# EAGLE board GameboyCartridgeKS_Modest (EAGLE 6.3)
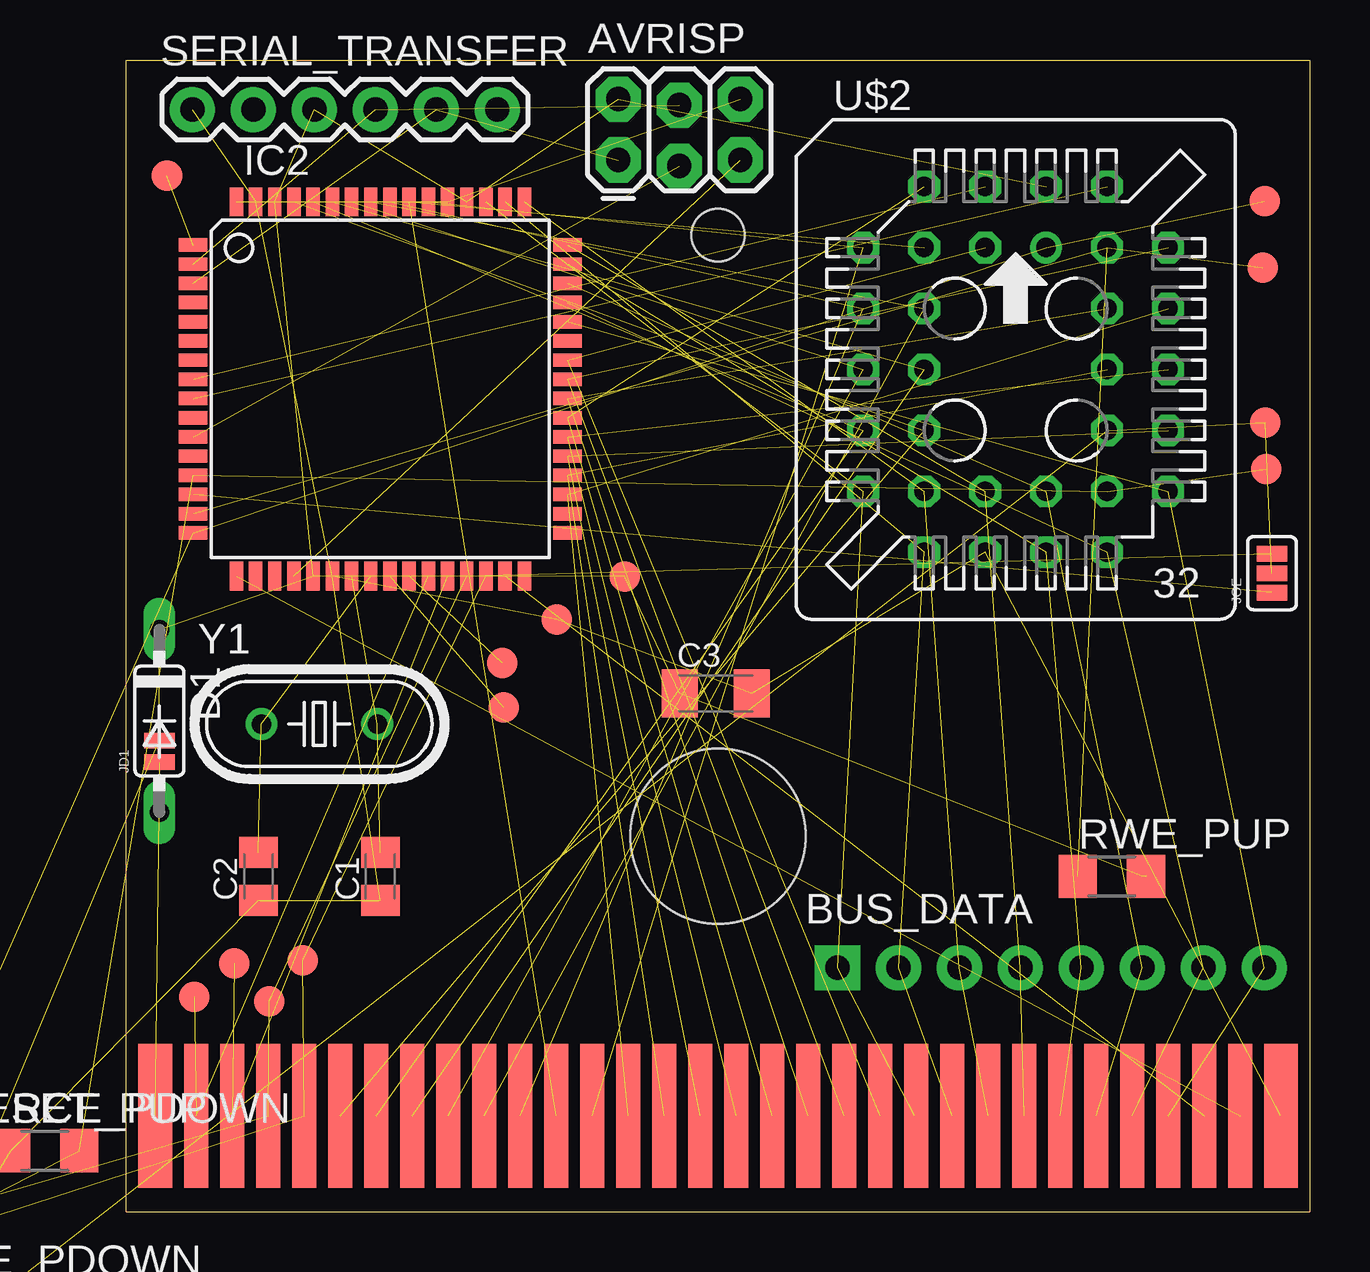
[diagram p0: board, top side]

Size 49.3 x 48 mm. Coordinates in mm from the lower left corner, seen from the top.
Outline: 49.3,48 49.3,0 0,0 0,48 49.3,48
Copper layers (1*16): Top 0.035mm / dielectric 1.5mm / Bottom 0.035mm
Design rules "default": minimum track width 6mil, minimum drill 12mil, track to track 6mil, track to pad 6mil, pad to pad 6mil, via to via 6mil, smd to smd 0mil, copper to edge 10mil, drill to drill 10mil, minimum pad ring 10mil, minimum via ring 6mil, stop-mask expansion 2mil, vias tented up to drill 100mil, thermal gap 10mil
Holes 7.3 mm at 24.65,15.65
Holes 2.2 mm at 24.65,40.7

## Footprints (pad centres in the part's own frame; a part is rotated, then mirrored left to right if it is on the bottom)
2X3_LOCK = drill 1.016 pad 1.88 octagon: 1 0,0; 2 0,2.54; 3 2.54,-0.254; 4 2.54,2.286; 5 5.08,0; 6 5.08,2.54
1X08_PIN1_NO_SILK = drill 1.016 pad 1.88 square: 1 0,0 | drill 1.016 pad 1.88: 2 2.54,0; 3 5.08,0; 4 7.62,0; 5 10.16,0; 6 12.7,0; 7 15.24,0; 8 17.78,0
C0805K = smd 1.3 x 1.6: 1 -1,0; 2 1,0
C1206K = smd 1.5 x 2: 1 -1.5,0; 2 1.5,0
DO35-7 = drill 0.813 long: A 3.81,0; C -3.81,0
TQFP64 = smd 1.194 x 0.559: 1 -7.8,6; 2 -7.8,5.2; 3 -7.8,4.4; 4 -7.8,3.6; 5 -7.8,2.8; 6 -7.8,2; 7 -7.8,1.2; 8 -7.8,0.4; 9 -7.8,-0.4; 10 -7.8,-1.2; 11 -7.8,-2; 12 -7.8,-2.8; 13 -7.8,-3.6; 14 -7.8,-4.4; 15 -7.8,-5.2; 16 -7.8,-6; 33 7.8,-6; 34 7.8,-5.2; 35 7.8,-4.4; 36 7.8,-3.6; 37 7.8,-2.8; 38 7.8,-2; 39 7.8,-1.2; 40 7.8,-0.4; 41 7.8,0.4; 42 7.8,1.2; 43 7.8,2; 44 7.8,2.8; 45 7.8,3.6; 46 7.8,4.4; 47 7.8,5.2; 48 7.8,6 | smd 0.559 x 1.194: 17 -6,-7.8; 18 -5.2,-7.8; 19 -4.4,-7.8; 20 -3.6,-7.8; 21 -2.8,-7.8; 22 -2,-7.8; 23 -1.2,-7.8; 24 -0.4,-7.8; 25 0.4,-7.8; 26 1.2,-7.8; 27 2,-7.8; 28 2.8,-7.8; 29 3.6,-7.8; 30 4.4,-7.8; 31 5.2,-7.8; 32 6,-7.8; 49 6,7.8; 50 5.2,7.8; 51 4.4,7.8; 52 3.6,7.8; 53 2.8,7.8; 54 2,7.8; 55 1.2,7.8; 56 0.4,7.8; 57 -0.4,7.8; 58 -1.2,7.8; 59 -2,7.8; 60 -2.8,7.8; 61 -3.6,7.8; 62 -4.4,7.8; 63 -5.2,7.8; 64 -6,7.8
PAD-JUMPER-2-NO_NO_SILK = smd 0.635 x 1.27: 1 -0.45,0; 2 0.45,0
PAD-JUMPER-3-NO_YES_SILK = smd 0.635 x 1.27: 1 -0.813,0; 2 0,0; 3 0.813,0
PAD.03X.05 = smd 1.27 x 1.27: P$1 0,0
R1206 = smd 1.6 x 1.803: 1 -1.422,0; 2 1.422,0
1X06 = drill 1.016 pad 1.88: 1 0,0; 2 2.54,0; 3 5.08,0; 4 7.62,0; 5 10.16,0; 6 12.7,0
CONNECTOR = smd 1.4 x 6: 1 0.7,-3; 32 47.6,-3 | smd 1 x 6: 2 2.4,-3; 3 3.9,-3; 4 5.4,-3; 5 6.9,-3; 6 8.4,-3; 7 9.9,-3; 8 11.4,-3; 9 12.9,-3; 10 14.4,-3; 11 15.9,-3; 12 17.4,-3; 13 18.9,-3; 14 20.4,-3; 15 21.9,-3; 16 23.4,-3; 17 24.9,-3; 18 26.4,-3; 19 27.9,-3; 20 29.4,-3; 21 30.9,-3; 22 32.4,-3; 23 33.9,-3; 24 35.4,-3; 25 36.9,-3; 26 38.4,-3; 27 39.9,-3; 28 41.4,-3; 29 42.9,-3; 30 44.4,-3; 31 45.9,-3
PLCC-S32 = drill 0.813: 1 1.27,5.08 | drill 0.813 octagon: 2 -1.27,7.62; 3 -1.27,5.08; 4 -3.81,7.62; 5 -6.35,5.08; 6 -3.81,5.08; 7 -6.35,2.54; 8 -3.81,2.54; 9 -6.35,0; 10 -3.81,0; 11 -6.35,-2.54; 12 -3.81,-2.54; 13 -6.35,-5.08; 14 -3.81,-7.62; 15 -3.81,-5.08; 16 -1.27,-7.62; 17 -1.27,-5.08; 18 1.27,-7.62; 19 1.27,-5.08; 20 3.81,-7.62; 21 6.35,-5.08; 22 3.81,-5.08; 23 6.35,-2.54; 24 3.81,-2.54; 25 6.35,0; 26 3.81,0; 27 6.35,2.54; 28 3.81,2.54; 29 6.35,5.08; 30 3.81,7.62; 31 3.81,5.08; 32 1.27,7.62
HC49U-V = drill 0.813: 1 -2.413,0; 2 2.413,0

## Placement (x,y rotation side)
AVRISP  AVR_SPI_PRG_62X3_LOCK  [2X3_LOCK]  20.49,43.83 0 top
BUS_DATA  [1X08_PIN1_NO_SILK]  29.63,10.16 0 top
C1  22pF  [C0805K]  10.58,13.97 90 top
C2  22pF  [C0805K]  5.5,13.97 90 top
C3  10uF  [C1206K]  24.55,21.59 0 top
D1  Germ.  [DO35-7]  1.37,20.45 270 top
IC2  MEGA64-A  [TQFP64]  10.58,34.29 0 top
JCE_CS  [PAD-JUMPER-2-NO_NO_SILK]  -12.28,-2.54 0 top  (outside the outline)
JD1  [PAD-JUMPER-2-NO_NO_SILK]  1.37,19.18 90 top
JOE  [PAD-JUMPER-3-NO_YES_SILK]  47.73,26.61 90 top
JOE_RD  [PAD-JUMPER-2-NO_NO_SILK]  -16.09,-2.54 0 top  (outside the outline)
PEN  TEST-POINT3X5  [PAD.03X.05]  1.69,43.18 0 top
RCE_PDOWN  [R1206]  -3.39,2.54 0 top
ROE_PDOWN  [R1206]  -7.2,-3.81 0 top  (outside the outline)
RRESET_PUP  [R1206]  -7.2,2.54 0 top  (outside the outline)
RWE_PUP  [R1206]  41.06,13.97 0 top
SCL  [PAD.03X.05]  15.72,21.02 0 top
SCL1  [PAD.03X.05]  2.83,8.95 0 top
SCL2  [PAD.03X.05]  4.48,10.35 0 top
SCL3  [PAD.03X.05]  5.94,8.76 0 top
SCL4  [PAD.03X.05]  7.34,10.48 0 top
SDA  [PAD.03X.05]  15.66,22.86 0 top
SERIAL_TRANSFER  [1X06]  2.75,45.93 0 top
TP1  [PAD.03X.05]  47.5,30.94 0 top
TP2  [PAD.03X.05]  47.45,32.89 0 top
TP3  [PAD.03X.05]  47.34,39.34 0 top
TP4  [PAD.03X.05]  47.42,42.11 0 top
TP5  [PAD.03X.05]  20.77,26.47 0 top
TP6  [PAD.03X.05]  17.93,24.67 0 top
U$1  CONNECTOR  [CONNECTOR]  0.5,7 0 top
U$2  EN29F002T  [PLCC-S32]  37.05,35.1 0 top
Y1  16MHz max  [HC49U-V]  8.04,20.32 0 top

## Library data of the parts
AVRISP BUS_DATA = SparkFun-Connectors
C1-C3 RCE_PDOWN ROE_PDOWN RRESET_PUP RWE_PUP = resistor
D1 = diode
IC2 = atmel; MPN: ATMEGA64-16AU; OC_FARNELL: 9171355; OC_NEWARK: 01M6899
JCE_CS JD1 JOE JOE_RD PEN SCL SCL1-SCL4 SDA TP1-TP6 = SparkFun-Passives
SERIAL_TRANSFER = SparkFun-Connectors; PROD_ID: CONN-08437
U$1 = gameboy
U$2 = kalshagar
Y1 = SparkFun-FreqCtrl

## Nets
22: BUS_DATA.1 IC2.51 U$1.22 U$2.13
23: BUS_DATA.2 IC2.50 U$1.23 U$2.14
24: BUS_DATA.3 IC2.49 U$1.24 U$2.15
25: BUS_DATA.4 IC2.48 U$1.25 U$2.17
26: BUS_DATA.5 IC2.47 U$1.26 U$2.18
27: BUS_DATA.6 IC2.46 U$1.27 U$2.19
28: BUS_DATA.7 IC2.45 U$1.28 U$2.20
29: BUS_DATA.8 IC2.44 U$1.29 U$2.21
!CE: IC2.13 JCE_CS.2 RCE_PDOWN.2 TP1.P$1 U$2.22
!GB_CS: IC2.30 JCE_CS.1 SCL4.P$1 U$1.5
!GB_RD: IC2.29 JOE.3 JOE_RD.1 SCL3.P$1 U$1.4
!GB_RESET: IC2.31 U$1.30
!GB_WR: IC2.28 SCL2.P$1 U$1.3
!OE: JOE.2 JOE_RD.2 ROE_PDOWN.2 TP2.P$1 U$2.24
!RESET: IC2.16 RRESET_PUP.1 TP4.P$1 U$2.1
!WE: IC2.15 RWE_PUP.1 TP3.P$1 U$2.31
ADDRESS0: IC2.61 U$1.6 U$2.12
ADDRESS1: IC2.60 U$1.7 U$2.11
ADDRESS2: IC2.59 U$1.8 U$2.10
ADDRESS3: IC2.58 U$1.9 U$2.9
ADDRESS4: IC2.57 U$1.10 U$2.8
ADDRESS5: IC2.56 U$1.11 U$2.7
ADDRESS6: IC2.55 U$1.12 U$2.6
ADDRESS7: IC2.54 U$1.13 U$2.5
ADDRESS8: IC2.35 U$1.14 U$2.27
ADDRESS9: IC2.36 U$1.15 U$2.26
ADDRESS10: IC2.37 U$1.16 U$2.23
ADDRESS11: IC2.38 U$1.17 U$2.25
ADDRESS12: IC2.39 U$1.18 U$2.4
ADDRESS13: IC2.40 U$1.19 U$2.28
ADDRESS14: IC2.41 U$1.20 U$2.29
ADDRESS15: IC2.42 U$1.21 U$2.3
ADDRESS16: IC2.8 U$2.2
ADDRESS17: IC2.9 U$2.30
CTS: SERIAL_TRANSFER.2
DTR: SERIAL_TRANSFER.6
GB_CLOCK: IC2.27 SCL1.P$1 U$1.2
GB_MIC_IN: IC2.17 U$1.31
GND: AVRISP.6 C1.1 C2.1 C3.2 IC2.22 IC2.53 IC2.63 RCE_PDOWN.1 ROE_PDOWN.1 SERIAL_TRANSFER.1 TP6.P$1 U$1.32 U$2.16
MISO_TX: AVRISP.1 IC2.3 SERIAL_TRANSFER.5
MOSI_RX: AVRISP.4 IC2.2 SERIAL_TRANSFER.4
N$1: IC2.26 SDA.P$1
N$2: C1.2 IC2.23 Y1.2
N$3: AVRISP.5 IC2.20
N$4: C2.2 IC2.24 Y1.1
N$5: IC2.25 SCL.P$1
N$7: IC2.14 JOE.1
PEN: IC2.1 PEN.P$1
SCK: AVRISP.3 IC2.11
VCC: AVRISP.2 C3.1 D1.C IC2.21 IC2.52 IC2.62 IC2.64 JD1.2 RRESET_PUP.2 RWE_PUP.2 SERIAL_TRANSFER.3 TP5.P$1 U$2.32
VDD: D1.A JD1.1 U$1.1

## Tracks (layer width: path | path; a pad name or v marks a point on that pad's centre or on a via)
22  (3 unrouted)
  Top 0.152: 32.85,4 U$1.22
23  (3 unrouted)
24  (3 unrouted)
25  (3 unrouted)
26  (3 unrouted)
27  (3 unrouted)
28  (3 unrouted)
29  (3 unrouted)
  Top 0.152: 43.35,4 U$1.29
!CE  (4 unrouted)
!GB_CS  (3 unrouted)
!GB_RD  (4 unrouted)
!GB_RESET  (1 unrouted)
!GB_WR  (2 unrouted)
!OE  (4 unrouted)
!RESET  (3 unrouted)
!WE  (3 unrouted)
ADDRESS0  (2 unrouted)
ADDRESS1  (2 unrouted)
ADDRESS2  (2 unrouted)
ADDRESS3  (2 unrouted)
ADDRESS4  (2 unrouted)
ADDRESS5  (2 unrouted)
  Top 0.152: 16.45,4 U$1.11
ADDRESS6  (2 unrouted)
ADDRESS7  (2 unrouted)
ADDRESS8  (2 unrouted)
ADDRESS9  (2 unrouted)
ADDRESS10  (2 unrouted)
ADDRESS11  (2 unrouted)
ADDRESS12  (2 unrouted)
ADDRESS13  (2 unrouted)
ADDRESS14  (2 unrouted)
  Top 0.152: 29.95,4 U$1.20
ADDRESS15  (2 unrouted)
ADDRESS16  (1 unrouted)
ADDRESS17  (1 unrouted)
GB_CLOCK  (2 unrouted)
GB_MIC_IN  (1 unrouted)
GND  (12 unrouted)
MISO_TX  (2 unrouted)
MOSI_RX  (2 unrouted)
N$1  (1 unrouted)
N$2  (2 unrouted)
N$3  (1 unrouted)
N$4  (2 unrouted)
N$5  (1 unrouted)
N$7  (1 unrouted)
PEN  (1 unrouted)
SCK  (1 unrouted)
VCC  (13 unrouted)
VDD  (2 unrouted)